# Altium PCB Multivibrateur.astable.PcbDoc
Units mm, origin at the board's own origin, x right, y up, seen from the top; angles counter-clockwise.
Board outline 40.13 x 40.13 mm, 2 copper layers (Top Layer, Bottom Layer), stack 1.571 mm thick; 11 components, 8 nets, 24 pads, 2 vias.
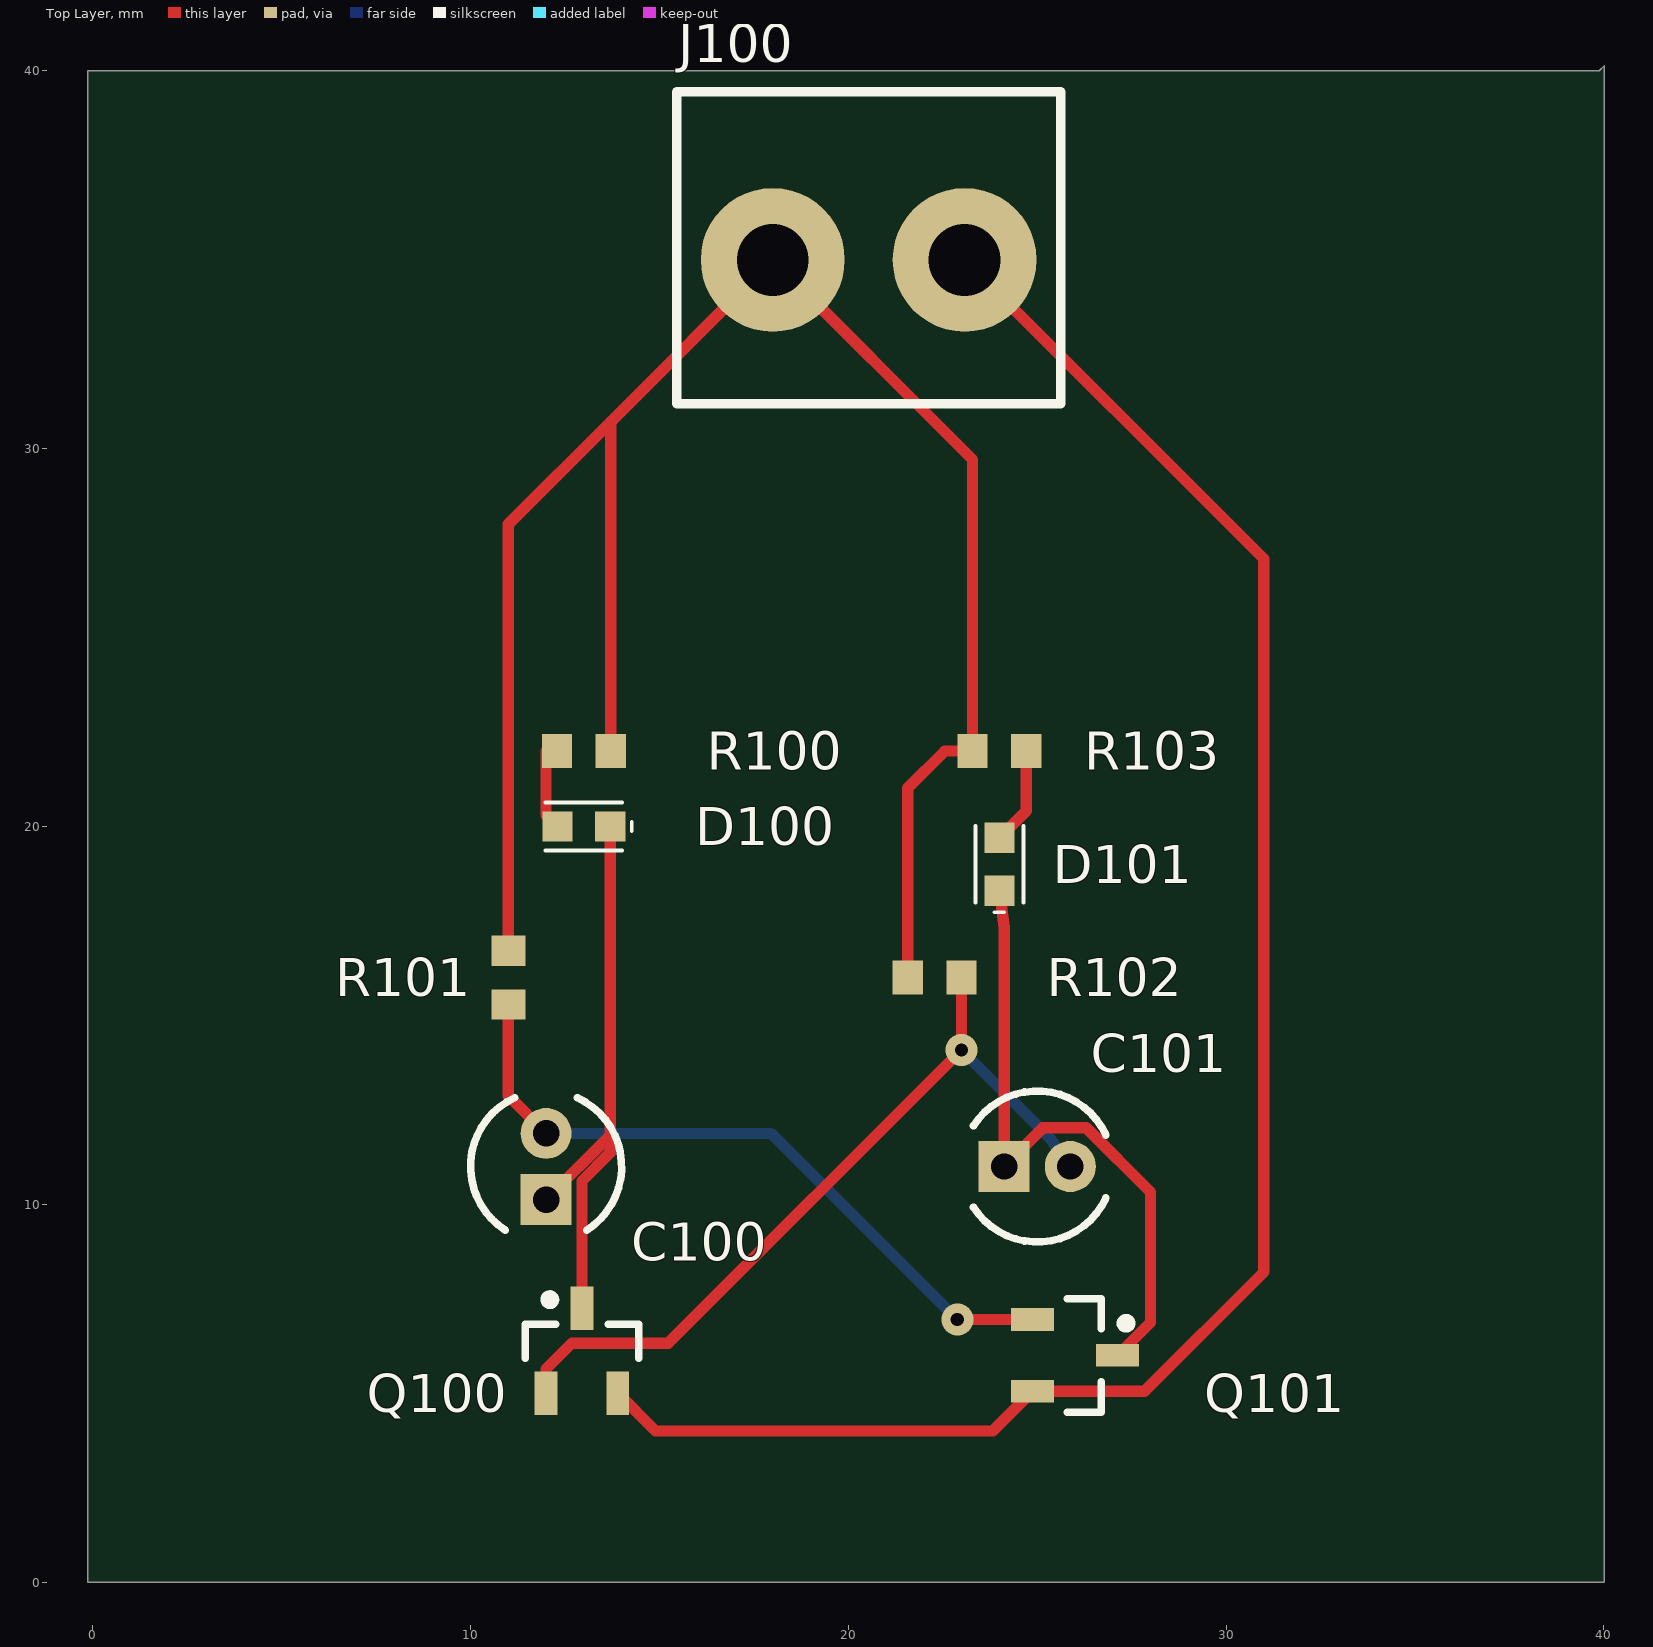
[diagram p0: Top Layer view]
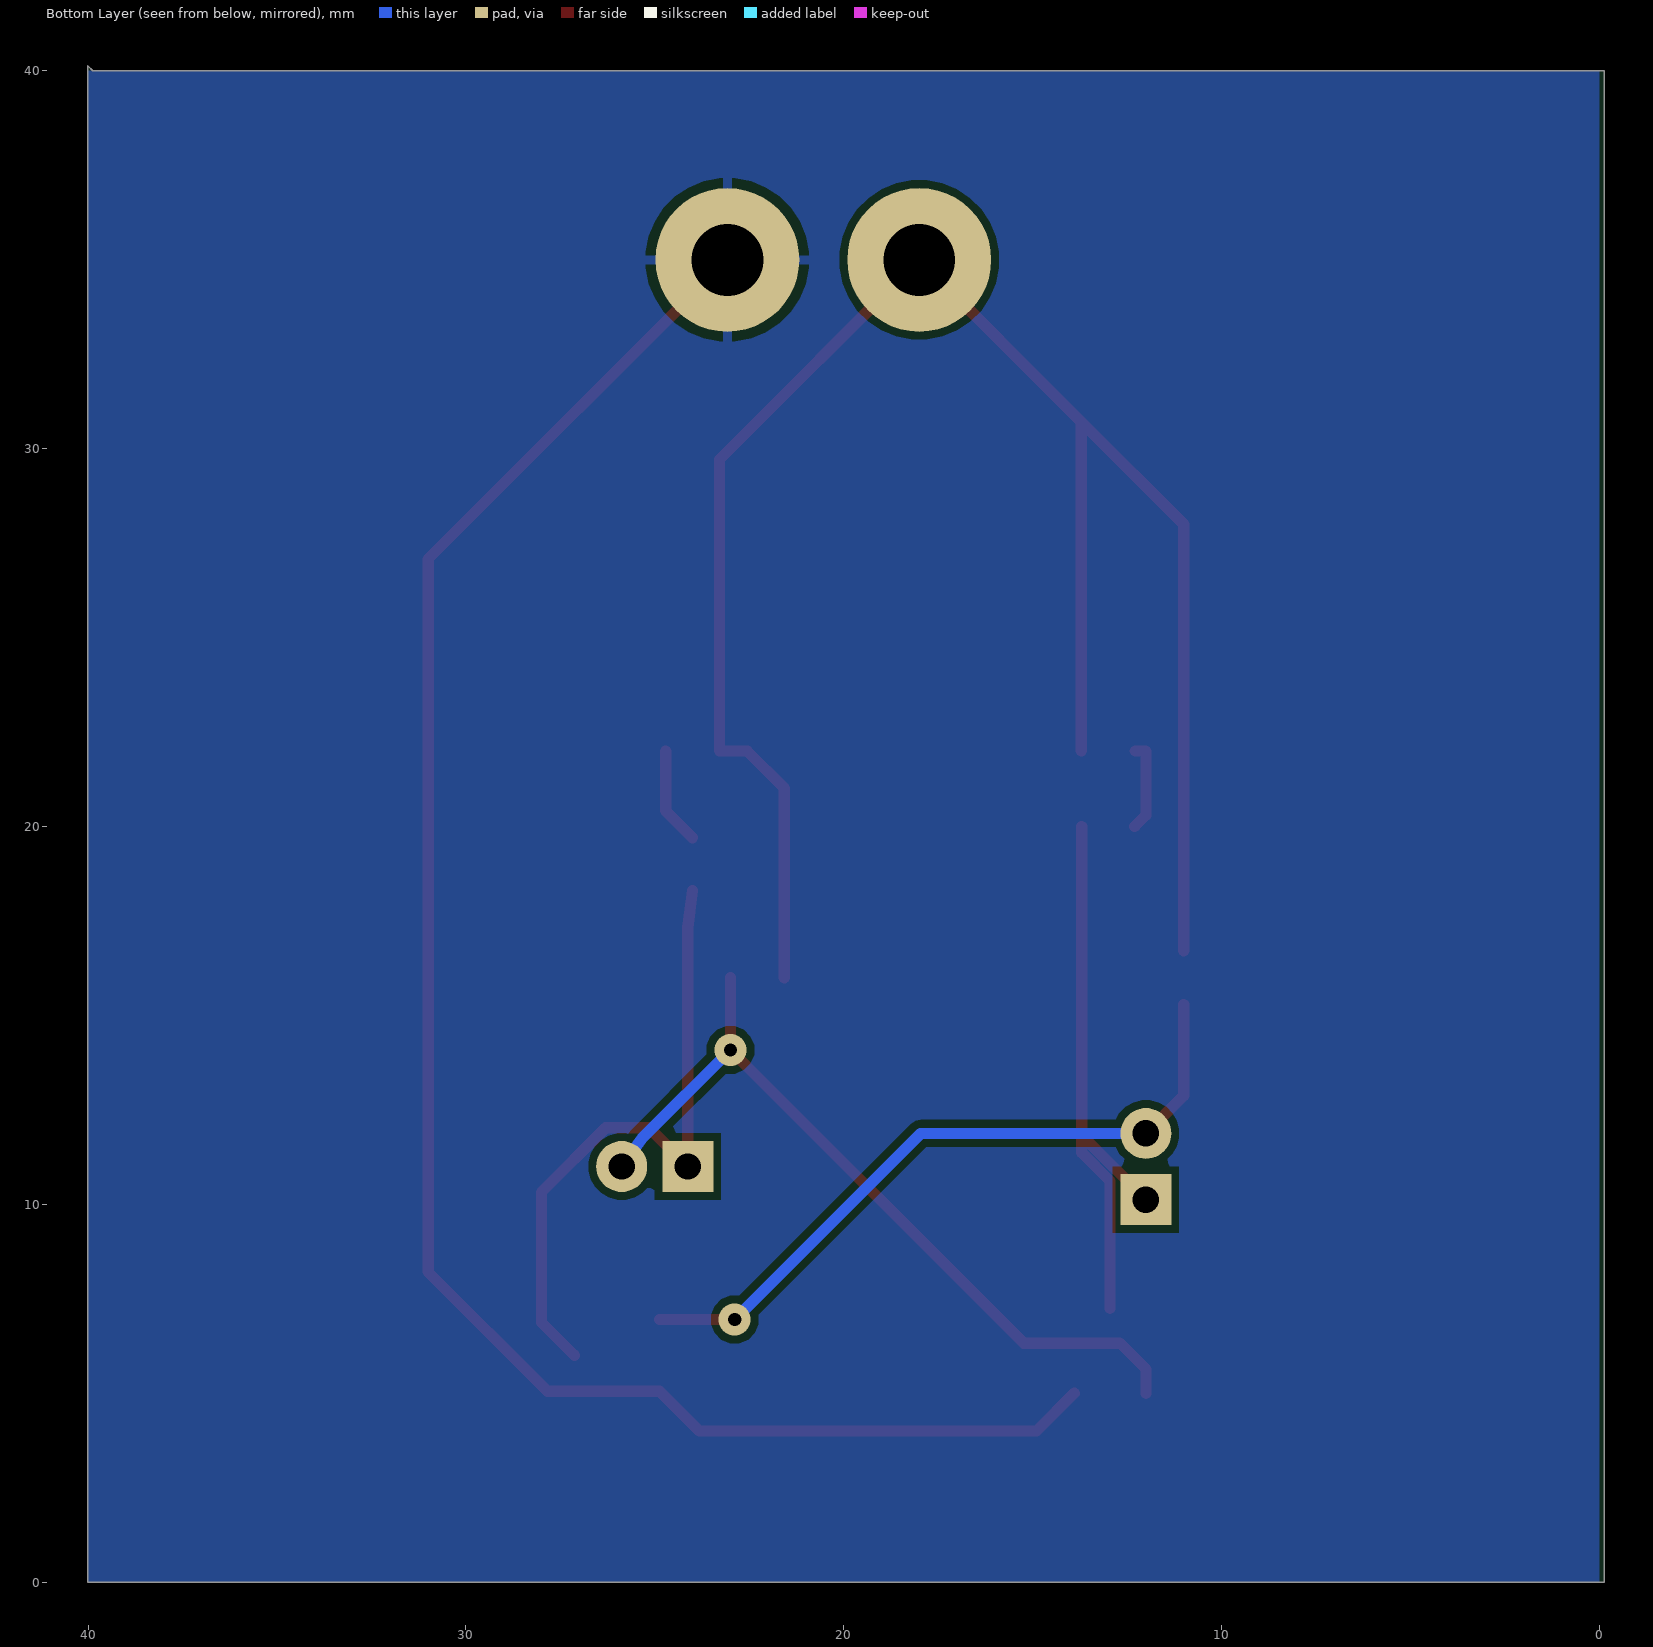
[diagram p1: Bottom Layer view, seen from below]
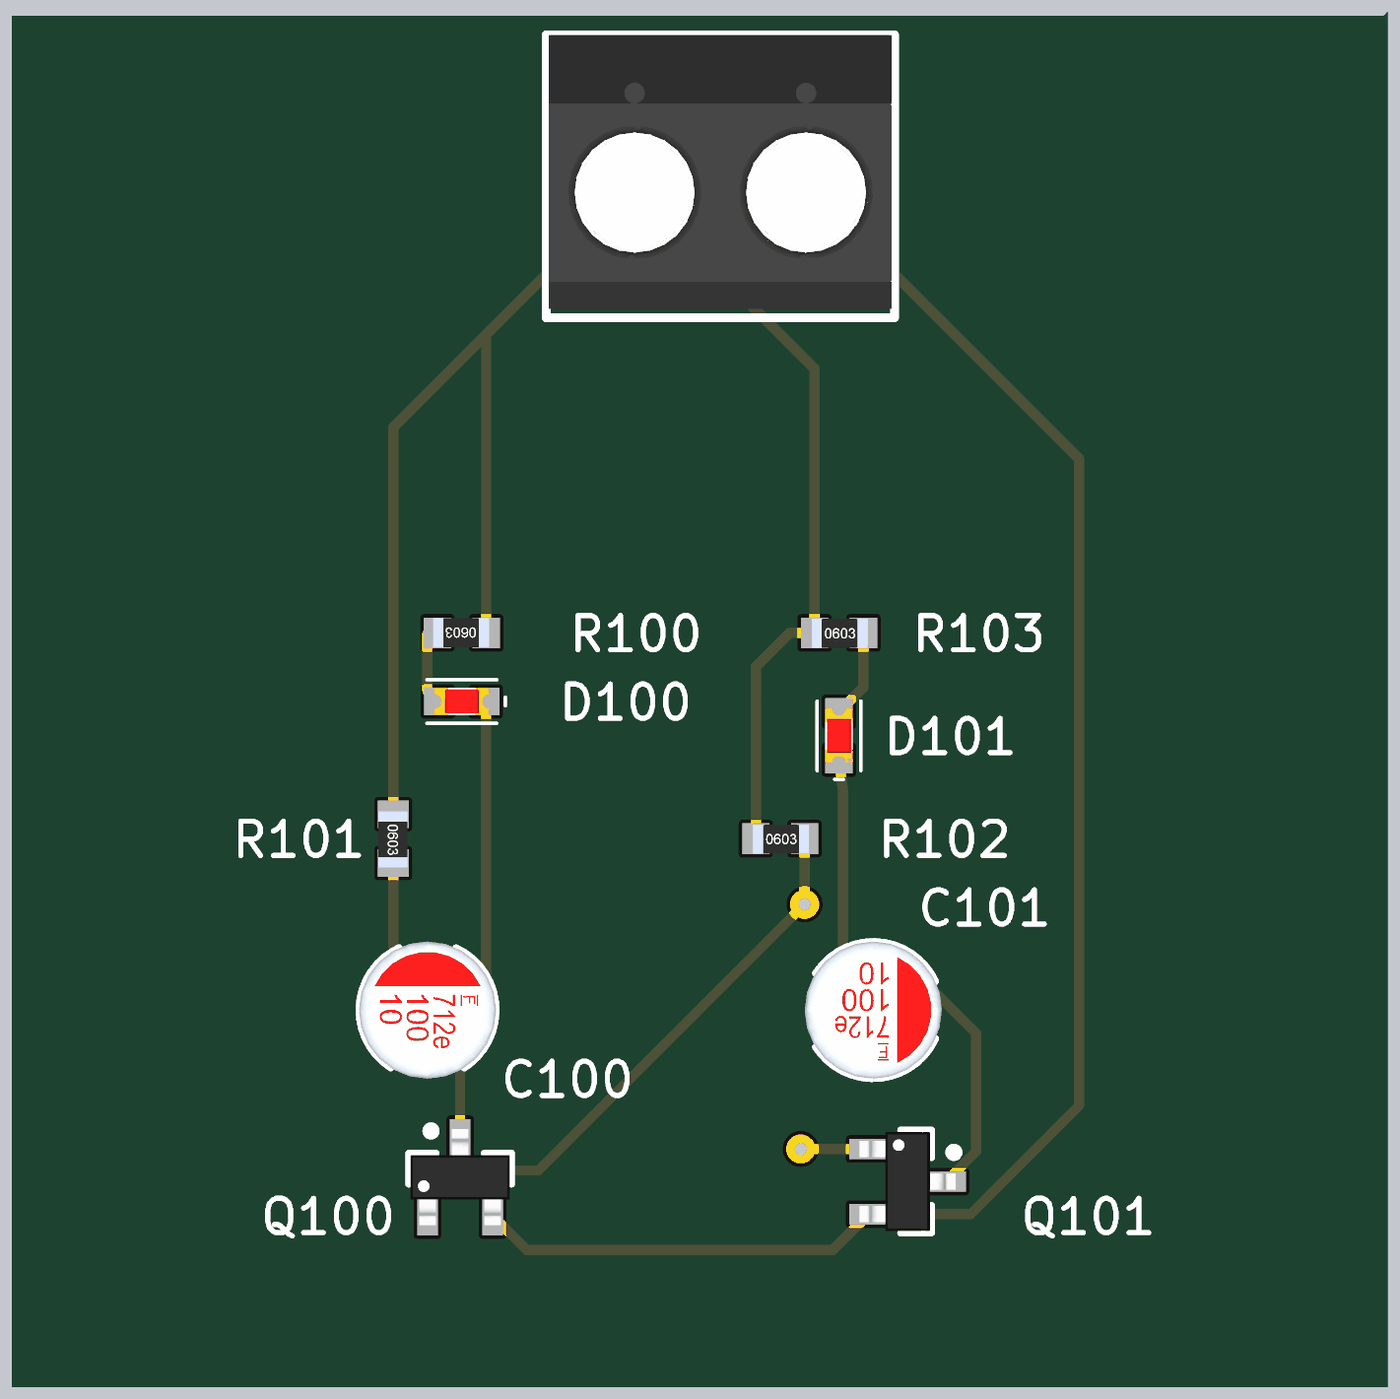
[diagram p2: 3D render of the assembled board from above, using the file's embedded part models]

## Layer stack, top to bottom
Top Solder: solder mask 0.0102, Solder Resist, Dk 3.5
Top Layer: signal copper 0.0356
Dielectric 1: dielectric 1.5, FR-4, Dk 4.8
Bottom Layer: signal copper 0.0356
Bottom Solder: solder mask 0.0102, Solder Resist, Dk 3.5

## Board outline
-0.127,0 -0.127,40.005 39.878,40.005 40.005,40.132 40.005,0

## Design rules (kind name [scope] priority, off if disabled: settings)
Clearance [All] p1: gap=0.2 ignorepadtopadclearanceinfootprint=FALSE
MinimumSolderMaskSliver [All] p1: minsoldermaskwidth=0.05
PolygonConnect [All] p1: connectstyle=Relief reliefconductorwidth=0.254 reliefentries=4 polygonreliefangle="90 Angle" airgapwidth=0.254
RoutingVias [All] p1: holewidth=0.35 width=0.85 viastyle="Through Hole" minholewidth=0.35 minwidth=0.85 maxholewidth=0.35 maxwidth=0.85
SilkToSolderMaskClearance [IsPad] p1: minsilkscreentomaskgap=0.1 clearancetoexposedcopper=TRUE
SolderMaskExpansion [All] p1: expansion=0.102 istentingtop=FALSE
SupplyNets "Schematic Supply Nets_1" [InNet('9V')] p1: voltage=0.000
SupplyNets "Schematic Supply Nets" [InNet('GND')] p2: voltage=0.000
Width [All] p1: maxlimit=1.5 minlimit=0.2 preferedwidth=0.3
28 further rules are at their usual default settings.

## Components (designator, comment, footprint, x,y, rotation, side; value= is the part's Value field where it differs from the comment)
C100 "Cap2" CAPR5-4X5 12,11 r90 top value=10uF
C101 "Cap2" CAPR5-4X5 25,11 r0 top value=10uF
D100 "LED_SMD" 0603_LED 13,20 r0 top value=RED
D101 "LED_SMD" 0603_LED 24,19 r270 top value=RED
J100 "2 PIN" "Header 2_PIN" 18,35 r0 top
Q100 "MMBT4401" SOT23_N 12.95,6.125 r90 top
Q101 "MMBT4401" SOT23_N 26,6 r0 top
R100 "Res1" R0603 13,22 r180 top value=470R
R101 "Res1" R0603 11,16 r270 top value=47K
R102 "Res1" R0603 22.286,16 r0 top value=47K
R103 "Res1" R0603 24,22 r0 top value=470R

## Footprints (in the part's own frame and the unit in brackets; to place one, negate y for a bottom-side part, rotate by r counter-clockwise, add the part's x,y. Pads: shape width x height; smd on the part's side, far side on the other; paste and mask are expansions set on the pad)
0603_LED [mm] "LED"
  rect 0.8x0.8 smd: 1(-0.7,0) 2(0.7,0)
  silkscreen extent -1.02,-0.63 1.27,0.64, body extent -0.8,-0.4 0.8,0.4, height 0.6
CAPR5-4X5 [mm] "Capacitor; 2 Leads"
  rect 1.35x1.35 hole 0.7: 1(-0.875,0)
  round 1.35 hole 0.7: 2(0.875,0)
  silkscreen extent -1.69,-2 1.82,2, body extent -2,-2 2,2, height 4.71
"Header 2_PIN" [mm] "200 mils"
  round 3.81 hole 1.905: 1(0,0) 2(5.08,0)
  silkscreen extent -2.54,-3.81 7.62,4.44, body extent -2.46,-3.55 7.54,4.44, height 10.03
R0603 [mm] "Chip Capacitor, Body 1.6x0.8mm, IPC High Density"
  rect 0.8x0.9 smd: 1(-0.711,0) 2(0.711,0)
  body extent -0.8,-0.43 0.84,0.41, height 0.41
SOT23_N [mm] "SOT23, 3-Leads, Body 2.9x1.3mm, Pitch 0.95mm, Lead Span 2.3mm - Reverse Pinning, IPC Medium Density"
  rect 1.15x0.6 smd: 1(1.125,0) 2(-1.125,-0.95) 3(-1.125,0.95)
  silkscreen extent -0.2,-1.5 1.47,1.5, body extent -1.4,-1.45 1.4,1.45, height 1.3

## Part data
C100 C101: "Capacitor", PackageDescription="Capacitor; 2 Leads", PackageReference=CAPR5-4X5, Simulation ModelName=CAP, Simulation PortMap=(1:1),(2:2)
D100 D101: "LED RED CLEAR 0603 SMD", Digikey Part Number=160-1447-1-ND, Manufacturer Part Number=LTST-C191KRKT, PackageDescription="1.60mm L x 0.80mm W", PackageReference="0603 (1608 Metric)", Simulation ModelName=LED2, Simulation PortMap=(1:1),(2:2)
J100: library part Connector_2Pin
Q100 Q101: library part NPN, "NPN Bipolar Transistor", Digikey Part Number=MMBT4401LT1GOSCT-ND, Manufacturer="ON Semiconductor", Manufacturer Part Number=MMBT4401LT1G, PackageDescription="SOT-23-3 (TO-236)", PackageReference="SOT-23-3 (TO-236)", Simulation ModelName=NPN, Simulation PortMap=(1:1),(2:2),(3:3)
R100 R101 R102 R103: "Resistor", PackageDescription="Axial Device, Thru-Hole; 2 Leads; 0.3 in Pin Spacing", PackageReference=AXIAL-0.3, Simulation ModelName=RESISTOR, Simulation PortMap=(1:1),(2:2)

## Via types
v1: diameter 0.85, hole 0.35, Top Layer to Bottom Layer, 2 vias

## Nets (pads, with @x,y where several pads share a name; then routed paths per layer and width w, separated by ;. In a path a pad name is that pad's centre, name@x,y a point inside that pad or via, vN(x,y) a via of type N, cw(c..) or ccw(c..) an arc to the next point about the centre after c; other vN are vias at no path point)
9V: J100.1 R100.1 R101.1 R102.1 R103.1 | length 52.2
  Top Layer w0.3: R101.1 11,28 13.711,30.711 ; R100.1 13.711,30.711 ; R102.1 21.575,21.02 22.555,22 R103.1 23.289,29.711 J100.1 13.711,30.711
GND: J100.2 Q100.2 Q101.2 | length 49.3
  Top Layer w0.3: Q100.2 14.9,4 23.825,4 Q101.2 27.838,5.05 31,8.212 31,27.08 J100.2
NetC100_1: C100.1 D100.2 Q100.1 | length 15.5
  Top Layer w0.3: C100.1 13.7,11.825 ; Q100.1 12.95,10.617 13.7,11.367 13.7,11.825 ; D100.2 13.7,11.825
NetC100_2: C100.2 Q101.3 R101.2 | length 18.7
  Top Layer w0.3: R101.2 11,12.875 C100.2 ; v1(22.885,6.95) Q101.3
  Bottom Layer w0.3: C100.2 17.96,11.875 v1(22.885,6.95)
NetC101_1: C101.1 D101.2 Q101.1 | length 17
  Top Layer w0.3: D101.2 24.125,17.328 C101.1 25.15,12.025 26.3,12.025 28,10.324 28,6.875 Q101.1
NetC101_2: C101.2 Q100.3 R102.2 | length 21.3
  Top Layer w0.3: Q100.3 12,5.639 12.686,6.325 15.235,6.325 v1(22.997,14.087) R102.2
  Bottom Layer w0.3: v1(22.997,14.087) 25.349,11.735 C101.2
NetD100_1: D100.1 R100.2 | length 2.4
  Top Layer w0.3: R100.2 12,22 12,20.3 D100.1
NetD101_1: D101.1 R103.2 | length 2.6
  Top Layer w0.3: D101.1 24.711,20.411 R103.2

## Polygon pours and split planes (outlines as drawn)
GND on Bottom Layer "GND_L02_P000" (solid, remove dead copper, pour order 0): 0,0 40,0 40,40 0,40